# Altium PCB Steering_Converter_1R1 - Copy.PcbDoc
Units mm, origin at the board's own origin, x right, y up, seen from the top; angles counter-clockwise.
Board outline 51.05 x 38.73 mm, 2 copper layers (Top Layer, Bottom Layer); 26 components, 23 nets, 106 pads, 23 vias.
Unrouted connection lines stored in the file: 25.
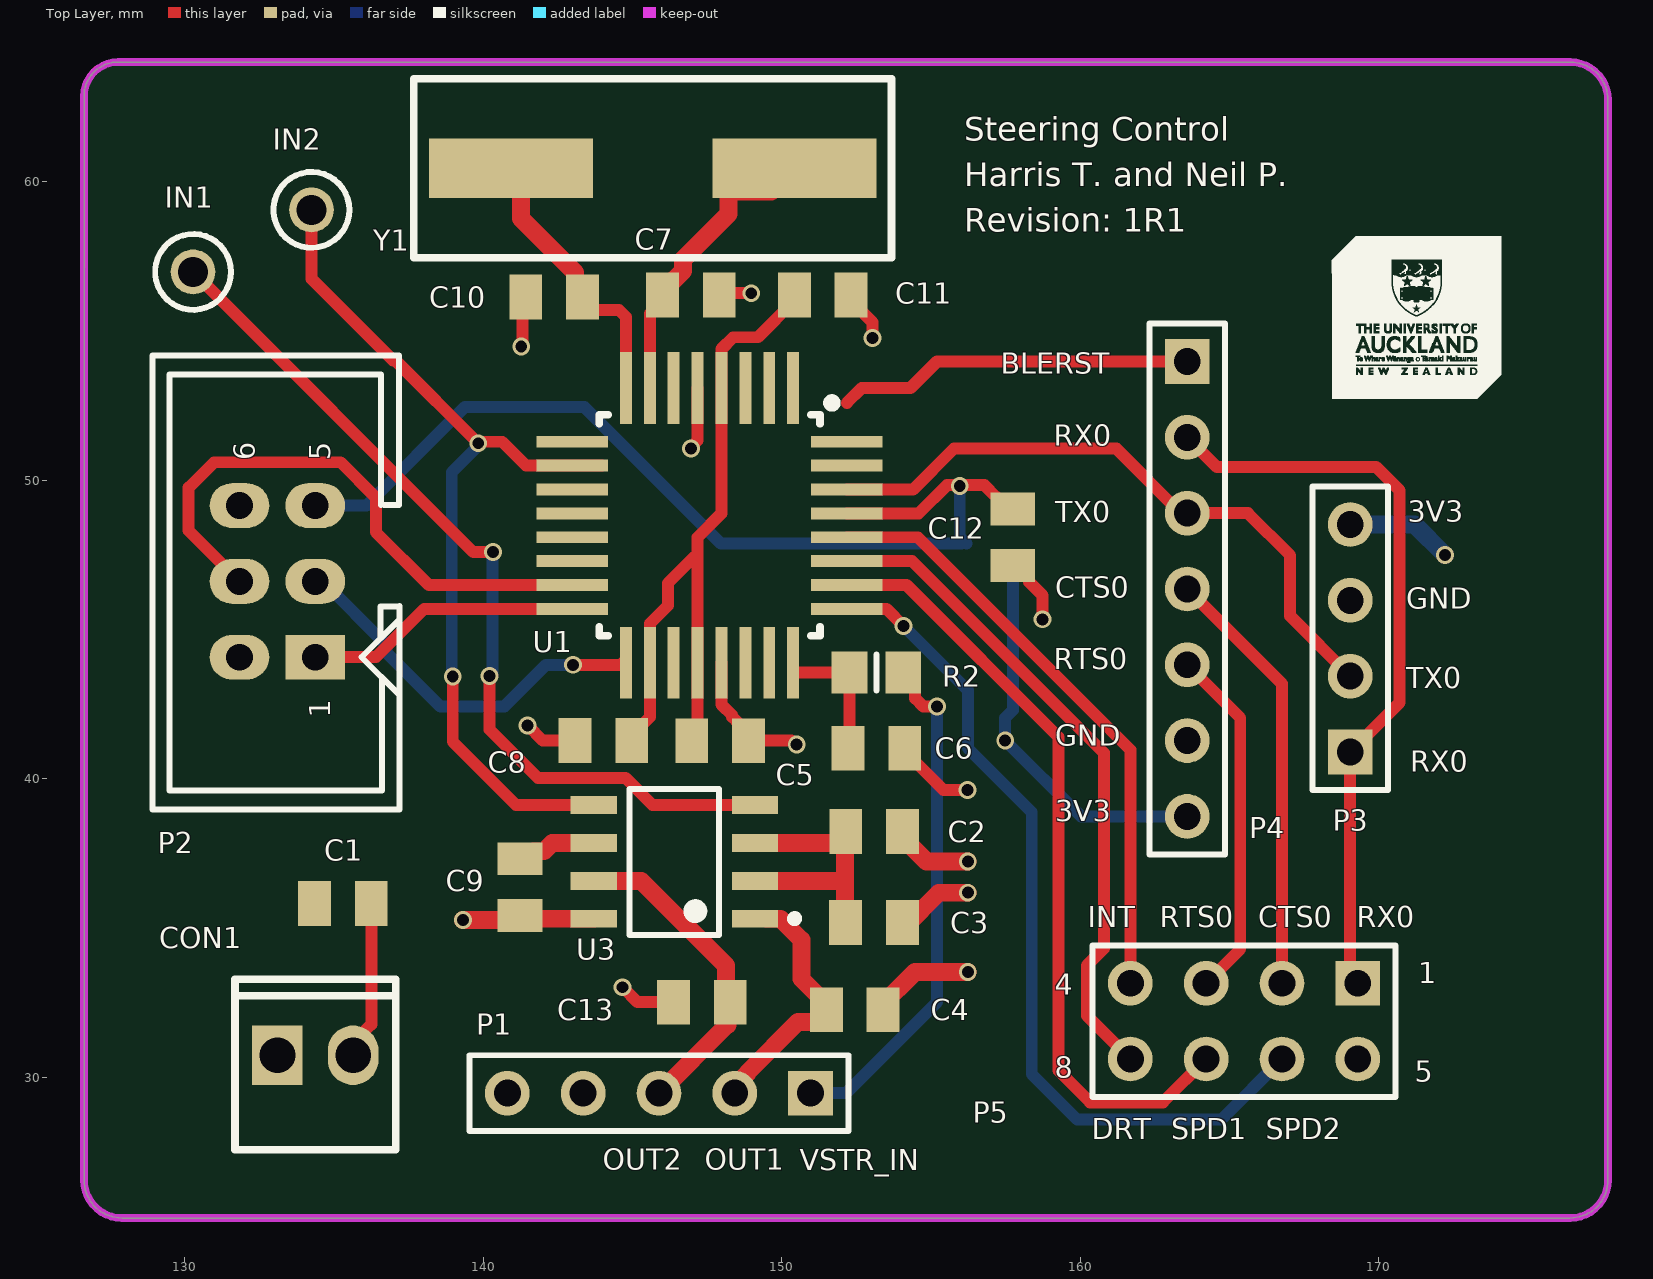
[diagram p0: Top Layer view]
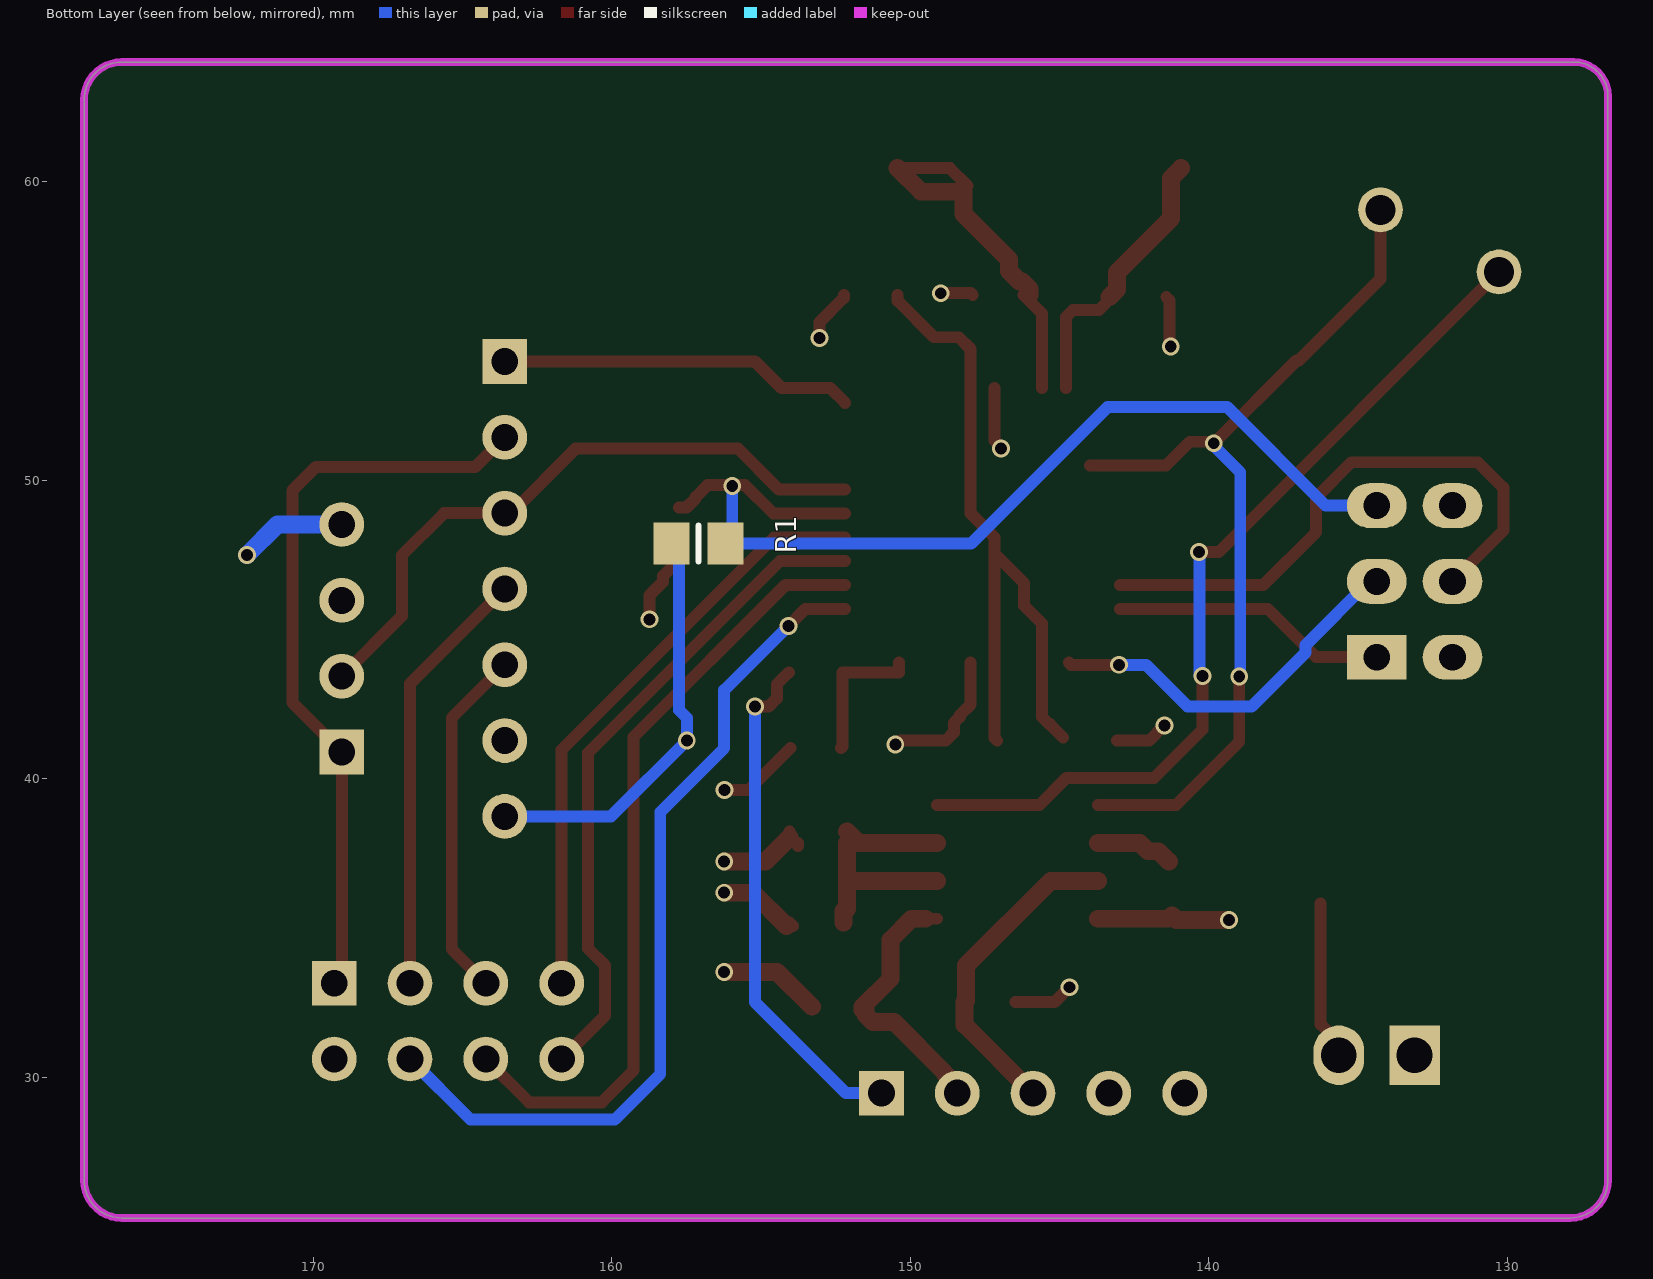
[diagram p1: Bottom Layer view, seen from below]

## Layer stack, top to bottom
Top Solder: solder mask 0.0102, Solder Resist, Dk 3.5
Top Layer: signal copper 0.0356
Dielectric 1: dielectric 0.32, FR-4, Dk 4.8
Bottom Layer: signal copper 0.0356
Bottom Solder: solder mask 0.0102, Solder Resist, Dk 3.5

## Board outline
126.619,26.551 126.619,62.865 cw(c127.762,62.865) 127.762,64.008 176.403,64.008 cw(c176.403,62.738) 177.673,62.738 177.673,26.551 cw(c176.403,26.551) 176.403,25.281 127.889,25.281 cw(c127.889,26.551)

## Design rules (kind name [scope] priority, off if disabled: settings)
Clearance Clearance_1 [InNamedPolygon('NONET_L01_P001') Or InNamedPolygon('GND_L02_P003')] p1: gap=0.4 ignorepadtopadclearanceinfootprint=FALSE
Clearance [All] p2: gap=0.5 ignorepadtopadclearanceinfootprint=TRUE except(0.3: Track-Track Track-SMDPad)
PolygonConnect [All] p1: connectstyle=Relief reliefconductorwidth=0.254 reliefentries=4 polygonreliefangle="90 Angle" airgapwidth=0.254
RoutingVias [All] p1: holewidth=0.711 width=1.27 viastyle="Through Hole" minholewidth=0.711 minwidth=1.27 maxholewidth=0.711 maxwidth=1.27
SolderMaskExpansion [All] p1: expansion=0.102 istentingtop=FALSE
Width [All] p1: maxlimit=0.6 minlimit=0.4 preferedwidth=0.4
30 further rules are at their usual default settings.

## Components (designator, comment, footprint, x,y, rotation, side; value= is the part's Value field where it differs from the comment)
C1 "100n" C0805 135.294,35.814 r180 top value=?
C2 "100n" C0805 153.088,38.227 r180 top value=?
C3 "100n" C0805 153.084,35.179 r180 top value=?
C4 "100n" C0805 152.439,32.258 r180 top value=?
C5 "100n" C0805 147.929,41.27 r180 top value=?
C6 "100n" C0805 153.162,41.021 r180 top value=?
C7 "18p" C0805 146.95,56.207 r180 top value=?
C8 "100n" C0805 144.018,41.275 r0 top value=?
C9 "1u" C0805 141.224,36.369 r90 top value=?
C10 "18p" C0805 142.367,56.134 r0 top value=?
C11 "100n" C0805 151.369,56.207 r180 top value=?
C12 "100n" C0805 157.734,48.087 r90 top value=?
C13 "100n" C0805 147.32,32.512 r0 top value=?
CON1 "Header 2X1" HDR2X1_2P54 133.096,30.734 r90 top
IN1 "5003" TP_TH 130.271,56.977 r0 top
IN2 "5003" TP_TH 134.239,59.055 r0 top
P1 "Header 5" HDR1X5 150.96,29.464 r180 top
P2 "HDR3X2" HDR2X3_2P54 134.366,44.069 r90 top
P3 "Header 4" HDR1X4 169.037,40.894 r90 top
P4 "BLE Header" HDR1X7 163.576,53.975 r270 top
P5 "Header 4X2A" HDR2X4_CEN 169.291,33.147 r180 top
R1 "Resistor 0805" R0805 157.088,47.879 r0 bottom value=?
R2 "Resistor 0805" R0805 153.162,43.561 r180 top value=?
U1 "ATMega328PB" TQFP32 147.574,48.487 r270 top
U3 "IC_Diodes_ZXBM5210-S-13_eec" Diodes_ZXBM5210-S-13_0 146.398,37.211 r90 top
Y1 "SMT-XTAL 8MHz" HC49-US 145.669,60.452 r180 top

## Footprints (in the part's own frame and the unit in brackets; to place one, negate y for a bottom-side part, rotate by r counter-clockwise, add the part's x,y. Pads: shape width x height; smd on the part's side, far side on the other; paste and mask are expansions set on the pad)
C0805 [mm]
  rect 1.1x1.5 smd: 1(-0.95,0) 2(0.95,0)
  body extent -1.1,-0.72 1.1,0.72, height 1.1
Diodes_ZXBM5210-S-13_0 [mm]
  rect 0.6x1.55 smd paste+0 mask+0: 1(-1.905,-2.7) 2(-0.635,-2.7) 3(0.635,-2.7) 4(1.905,-2.7) 5(1.905,2.7) 6(0.635,2.7) 7(-0.635,2.7) 8(-1.905,2.7)
  silkscreen extent -2.45,-4.15 2.45,1.5
HC49-US [mm] "20Mhz Crystal"
  rect 5.5x2 smd: 1(-4.75,0) 2(4.75,0)
  silkscreen extent -8,-3 8,3, body extent -4.79,-2.4 4.79,2.4, height 3.8
HDR1X4 [mm] "Connector; Header; 4 Position"
  rect 1.5x1.5 hole 0.9: 1(0,0)
  round 1.5 hole 0.9: 2(2.54,0) 3(5.08,0) 4(7.62,0)
  silkscreen extent -1.27,-1.27 8.89,1.27
HDR1X5 [mm] "Connector; Header; 5 Position"
  rect 1.5x1.5 hole 0.9: 1(0,0)
  round 1.5 hole 0.9: 2(2.54,0) 3(5.08,0) 4(7.62,0) 5(10.16,0)
  silkscreen extent -1.27,-1.27 11.43,1.27
HDR1X7 [mm] "Connector; Header; 7 Position"
  rect 1.5x1.5 hole 0.9: 1(0,0)
  round 1.5 hole 0.9: 2(2.54,0) 3(5.08,0) 4(7.62,0) 5(10.16,0) 6(12.7,0) 7(15.24,0)
  silkscreen extent -1.27,-1.27 16.51,1.27
HDR2X1_2P54 [mm] "Polarised Header 2 way"
  rect 2x1.7 hole 1.2: 1(0,0)
  oval 2x1.7 hole 1.2: 2(0,-2.54)
  silkscreen extent -3.16,-3.96 2.54,1.42, body extent -3.3,-3.64 3.17,1.44, height 9.99
HDR2X3_2P54 [mm] "IDC 3X2 Way 2.54 pitch"
  rect 1.5x2 hole 0.9: 1(0,0)
  oval 1.5x2 hole 0.9 paste+0: 2(0,2.54)
  oval 1.5x2 hole 0.9: 3(2.54,0) 4(2.54,2.54) 5(5.08,0) 6(5.08,2.54)
  silkscreen extent -5.1,-2.82 10.1,5.45, body extent -5.07,-3.17 10.17,6.28, height 9.1
HDR2X4_CEN [mm] "Connector; Header; 4x2 Position"
  rect 1.5x1.5 hole 0.9: 1(0,0)
  round 1.5 hole 0.9: 2(2.54,0) 3(5.08,0) 4(7.62,0) 5(0,2.54) 6(2.54,2.54) 7(5.08,2.54) 8(7.62,2.54)
  silkscreen extent -1.27,-1.27 8.89,3.81
R0805 [mm]
  rect 1.2x1.4 smd: 1(-0.9,0) 2(0.9,0)
  silkscreen extent 0,-0.6 0,0.6, body extent -1.07,-0.7 1.07,0.7, height 0.65
TP_TH [mm] "Test Point, Through Hole, Dia 2.54mm"
  round 1.5 hole 1: 1(0,0)
  silkscreen extent -1.27,-1.27 1.27,1.27, body extent -1.27,-1.27 1.27,1.27, height 4.57
TQFP32 [mm]
  rect 2.4x0.4 smd: 1(-4.6,2.8) 2(-4.6,2) 3(-4.6,1.2) 4(-4.6,0.4) 5(-4.6,-0.4) 6(-4.6,-1.2) 7(-4.6,-2) 8(-4.6,-2.8) 17(4.6,-2.8) 18(4.6,-2) 19(4.6,-1.2) 20(4.6,-0.4) 21(4.6,0.4) 22(4.6,1.2) 23(4.6,2) 24(4.6,2.8)
  rect 0.4x2.4 smd: 9(-2.8,-4.6) 10(-2,-4.6) 11(-1.2,-4.6) 12(-0.4,-4.6) 13(0.4,-4.6) 14(1.2,-4.6) 15(2,-4.6) 16(2.8,-4.6) 25(2.8,4.6) 26(2,4.6) 27(1.2,4.6) 28(0.4,4.6) 29(-0.4,4.6) 30(-1.2,4.6) 31(-2,4.6) 32(-2.8,4.6)
  silkscreen extent -4.24,-3.7 3.7,4.24, body extent -3.5,-3.5 3.5,3.5, height 1.3

## Part data
C1 C2 C3 C4 C6 C7 C8 C9 C10 C11 C12 C13: library part CCAP0805, "CCAP0805", MPN=?, Part Description=?, Type="Surface Mount"
C5: library part CCAP0805, "CCAP0805", MPN=?, Supplier Part Number 1=1276-1099-1-ND, Part Description=?, Supplier 1=Digi-Key, Type="Surface Mount"
CON1: library part HDR2X1
IN1 IN2: library part TestPoint, "Test Point, Orange, 1-Pin THD, RoHS", Forward Current="3 A", Forward Voltage="1.08 V", Max Operating Temperature="150 degC", Max Surge Current="80 A", Min Operating Temperature="-65 degC", Package Quantity=500, Peak Reverse Current="600 uA", ComponentLink1Description="Manufacturer URL", ComponentLink1URL=http://www.keyelco.com/, ComponentLink2Description=Datasheet, ComponentLink2URL=http://keyelco.com/userAssets/file/M65p56.pdf, DatasheetVersion=Jun-15, Diameter="5.3 mm", Height="0.25 inch", Length="9.5 mm", Mount="Through Hole", PackageDescription="1-Pin Through Hole Device, Dia 2.54 mm", PackageReference=5003, Packaging=Bulk, Pins=2, Radiation Hardening=No, REACH SVHC="No SVHC", RoHSCompliant=true, Weight="0.01 lb", Width="0.25 inch"
P1: "Header, 5-Pin", LatestRevisionDate=17-Jul-2002, LatestRevisionNote="Re-released for DXP Platform.", Publisher="Altium Limited"
P2: "Header, 3-Pin, Dual row"
P3: "Header, 4-Pin", LatestRevisionDate=17-Jul-2002, LatestRevisionNote="Re-released for DXP Platform.", Publisher="Altium Limited"
P4: library part "Header 7", "Header, 7-Pin", LatestRevisionDate=17-Jul-2002, LatestRevisionNote="Re-released for DXP Platform.", Publisher="Altium Limited"
P5: "Header, 4-Pin, Dual row", LatestRevisionDate=17-Jul-2002, LatestRevisionNote="Re-released for DXP Platform.", Publisher="Altium Limited"
R1 R2: library part RES0805, "RES0805", MPN=?, Part Description=?, Type="Surface Mount"
U1: "IC MCU 8BIT 32KB FLASH 32TQFP", Supplier Part Number 1=ATMEGA328PB-AU-ND, Supplier 1=Digi-Key, Supplier 2=Digi-Key, Supplier 3=Digi-Key, Supplier 4=Digi-Key
U3: "IC MOTOR DRIVER PWM 8SOIC", Digikey Part Number=ZXBM5210-S-13DICT-ND, Manufacturer=Diodes, Mouser Part Number=621-ZXBM5210-S-13, Package=SO-8, Part Number=ZXBM5210-S-13, Temperature="-40°C to +85°C", Temperature Range High=+85°C, Temperature Range Low=-40°C, Voltage=18V, ComponentLink1Description=Upverter, ComponentLink1URL=https://upverter.com/upn/revision/7a867377f73a3c32/, ComponentLink2Description=Datasheet, ComponentLink2URL=https://www.diodes.com/assets/Datasheets/ZXBM5210.pdf, Digikey Description="IC MOTOR DRIVER PWM 8SOIC", helpURL=https://upverter.com/upn/revision/7a867377f73a3c32/, Lead Free=yes, Price=0.759009212461, RoHS=TRUE, Supplier 1=Digi-Key, Supplier 2=Mouser, Supplier Part Number 1=ZXBM5210-S-13DICT-ND, Supplier Part Number 2=621-ZXBM5210-S-13
Y1: library part TXC9C-16_XTAL_SMT, "9C-16.000MAAJ-T crystal 16.0000MHZ 18PF SMD", Frequency Stability=±30ppm, Load Capacitance=18pF, Manufacturer="TXC CORPORATION", Manufacturer Part Number=9C-16.000MAAJ-T, Operating Mode=Fundamental, Operating Temperature="-20°C ~ 70°C", Package / Case=HC-49/US, Ratings=-, Supplier Part Number 1=887-1059-1-ND, Category="Crystals, Oscillators, Resonators", ComponentLink1Description=http://www.txccorp.com/download/products/quartz_crystals/2015TXC_9C_32.pdf, ComponentLink1URL=http://www.txccorp.com/download/products/quartz_crystals/2015TXC_9C_32.pdf, Frequency Tolerance=±30ppm, Height - Seated (Max)="0.161\" (4.10mm)", Mounting Type="Surface Mount", Packaging="Cut Tape (CT)", Part Status=Active, Pricing 1="1=0.75, 10=0.628, 50=0.5656, 100=0.5026, 500=0.47744 (NZD)", RoHS="RoHS Compliant", Size / Dimension="0.449\" L x 0.189\" W (11.40mm x 4.80mm)", Stock 1=11514, Supplier 1=Digi-Key, Type="MHz Crystal"

## Via types
v1: diameter 0.6, hole 0.4, Top Layer to Bottom Layer, 23 vias

## Nets (pads, with @x,y where several pads share a name; then routed paths per layer and width w, separated by ;. In a path a pad name is that pad's centre, name@x,y a point inside that pad or via, vN(x,y) a via of type N, cw(c..) or ccw(c..) an arc to the next point about the centre after c; other vN are vias at no path point)
3V3: C1.2 C2.2 C3.2 C5.2 C8.2 C9.2 C11.2 CON1.1 P1.5 P2.2 P3.4 P4.7 R1.2 U1.4 U1.18 U1.20 U3.2 U3.3 U3.6 | length 52.3
  Top Layer w0.4: C8.2@144.868,41.375 145.318,41.825 145.34,41.825 145.574,42.059 U1.18@145.574,43.787 ; U1.18 145.574,45.194 146.179,45.799 146.179,46.547 147.079,47.447 ; C5.2@147.079,41.27 147.174,41.365 U1.20 147.174,47.447 147.174,48.087 147.974,48.887 147.974,54.394 148.367,54.787 149.199,54.787 150.419,56.007 C11.2 ; P4.7 P4.7@163.786,38.525
  Top Layer w0.6: C9.2@141.324,37.219 141.674,37.569 142.027,37.569 142.304,37.846 U3.6 ; U3.2 152.111,36.576 ; U3.3 151.73,37.846 C2.2@152.111,38.227 ; C3.2@152.111,35.629 152.111,36.576 ; C2.2@152.111,37.846 152.111,36.576 ; C3.2@152.165,35.629 152.234,35.56 C3.2@152.234,35.179
  Bottom Layer w0.4: R1.2@157.734,47.23 157.734,42.291 157.48,42.037 v1(157.48,41.275) 160.02,38.735 P4.7
  Bottom Layer w0.6: P3.4 171.192,48.514 v1(172.219,47.487)
BLE_RST: P4.1 U1.2 | length 12.5
  Top Layer w0.4: 152.174,52.587 152.674,53.087 153.035,53.087 154.306,53.087 155.194,53.975 P4.1
  Bottom Layer w0.6: P4.1 P4.1@163.957,54.356
CTS_0: P4.4 P5.2 | length 14.5
  Top Layer w0.4: P4.4 166.751,43.18 P5.2
DRT: P5.8 U1.27 | length 22.4
  Top Layer w0.4: U1.27 154.363,47.287 160.782,40.868 160.782,34.309 160.221,33.748 160.221,32.057 P5.8
GND: C1.1 C2.1 C3.1 C4.1 C5.1 C6.1 C7.1 C8.1 C9.1 C10.1 C11.1 C12.1 C13.1 CON1.2 P1.4 P2.6 P3.3 P4.6 U1.5 U1.21 U3.8 | length 39.2
  Top Layer w0.4: CON1.2 135.636,31.16 136.244,31.768 C1.1 ; v1(141.267,54.483) 141.305,54.521 141.305,56.022 C10.1 ; v1(141.478,41.783) 141.986,41.275 C8.1 ; v1(144.653,33.012) 144.661,33.012 145.161,32.512 C13.1 C13.1@146.47,32.512 ; v1@146.95,51.108 147.174,51.332 U1.5 ; C7.1 147.968,56.275 148.957,56.275 v1(148.971,56.261) ; U1.21 147.974,42.482 148.329,42.127 148.329,42.07 148.529,41.87 148.529,41.55 148.804,41.275 150.314,41.275 150.441,41.148 v1(150.495,41.148) ; C11.1@152.219,56.207 152.219,56.107 153.035,55.291 v1(153.035,54.762) ; C2.1@153.758,37.746 C2.1@153.758,37.846 ; C3.1@153.924,35.069 C3.1 C3.1@154.144,35.069 ; C6.1@154.012,41.021 155.409,39.624 v1(156.21,39.624) ; C2.1@154.038,38.027 C2.1 ; C12.1 157.934,47.137 158.284,46.787 158.284,46.587 158.734,46.137 v1(158.734,45.339)
  Top Layer w0.6: v1(139.319,35.269) 141.074,35.269 C9.1 141.337,35.306 U3.8 ; C4.1@153.289,32.358 154.459,33.528 v1(156.226,33.528) ; C2.1@154.038,38.027 154.838,37.227 v1(156.226,37.227) ; C3.1@154.144,35.069 155.254,36.179 v1(156.226,36.179)
  other v1: 146.95,51.054
IN1: IN1.1 U1.13 U3.4 | length 29.8
  Top Layer w0.4: IN1.1 139.66,47.588 v1(140.326,47.588) ; v1(140.208,43.434) 140.208,41.639 141.822,40.025 144.76,40.025 145.669,39.116 U3.4
  Bottom Layer w0.4: v1@140.3,43.444 140.3,47.562 v1(140.326,47.588)
IN2: IN2.1 U1.10 U3.5 | length 30.7
  Top Layer w0.4: IN2.1 134.239,56.742 136.973,54.008 137.055,54.008 v1(139.827,51.236) 139.881,51.236 139.932,51.287 140.63,51.287 141.43,50.487 U1.10@143.974,50.487 ; v1(138.971,43.418) 138.971,41.242 141.097,39.116 U3.5
  Bottom Layer w0.4: v1(138.971,43.418) 138.938,43.451 138.938,50.265 139.827,51.154 v1(139.827,51.236)
MISO: P2.1 U1.16 | length 9.3
  Top Layer w0.4: P2.1 136.398,44.069 138.016,45.687 U1.16
MOSI: P2.4 U1.15 | length 19.4
  Top Layer w0.4: P2.4 130.126,48.309 130.126,49.75 130.975,50.599 135.217,50.599 136.398,49.418 136.398,48.26 138.176,46.482 141.852,46.482 141.857,46.487 U1.15
OUT1: C4.2 P1.2 U3.1 | length 9.1
  Top Layer w0.4: U3.1 U3.1@149.479,35.306
  Top Layer w0.6: P1.2 148.42,29.708 148.853,30.141 148.853,30.164 150.531,31.843 151.239,31.843 151.489,32.093 C4.2 ; U3.1@149.479,35.306 149.947,35.306 150.65,34.603 150.65,33.297 151.589,32.358 C4.2@151.589,32.258
OUT2: C13.2 P1.3 U3.7 | length 10.8
  Top Layer w0.6: U3.7 145.288,36.576 148.125,33.739 148.125,32.557 148.17,32.512 148.17,31.754 P1.3
RST: C12.2 P2.5 R1.1 U1.29 | length 33.2
  Top Layer w0.4: U1.29 154.584,48.887 155.534,49.837 156.78,49.837 157.184,49.433 157.184,49.387 157.488,49.083 C12.2@157.734,49.083
  Bottom Layer w0.4: P2.5 136.079,49.149 139.381,52.451 143.383,52.451 147.955,47.879 R1.1@156.013,47.879 ; v1(155.956,49.809) 155.956,48.111 R1.1
RTS_0: P4.5 P5.3 | length 11.9
  Top Layer w0.4: P4.5 165.354,42.037 165.354,34.29 P5.3
RX_0: P3.1 P4.2 P5.1 | length 25.1
  Top Layer w0.4: P4.2 164.57,50.441 169.904,50.441 170.688,49.657 170.688,42.545 P3.1 169.037,33.401 P5.1
SCK: P2.3 U1.17 | length 12.7
  Top Layer w0.4: v1(143.002,43.815) 144.602,43.815 U1.17@144.674,43.887
  Bottom Layer w0.4: P2.3 134.616,46.609 136.754,44.471 136.754,44.221 138.557,42.418 140.699,42.418 142.096,43.815 v1@142.875,43.815
SPD_1: P5.6 U1.25 | length 28.8
  Top Layer w0.4: U1.25 153.502,45.687 v1(154.078,45.112)
  Bottom Layer w0.4: v1(154.078,45.112) 156.226,42.963 156.226,41.022 158.369,38.879 158.369,30.099 159.893,28.575 164.719,28.575 P5.6
SPD_2: P5.7 U1.26 | length 26.4
  Top Layer w0.4: U1.26 154.173,46.487 159.258,41.402 159.258,30.226 160.327,29.157 162.761,29.157 P5.7
ST_INT: P5.4 U1.28 | length 20.3
  Top Layer w0.4: U1.28 154.553,48.087 161.671,40.969 P5.4
TX_0: P3.2 P4.3 U1.30 | length 21.8
  Top Layer w0.4: U1.30 154.394,49.687 155.761,51.054 161.207,51.054 163.366,48.895 165.608,48.895 167.022,47.481 167.022,45.449 P3.2
VSTR_IN: P1.1 R2.1 | length 17.3
  Top Layer w0.4: R2.1 154.462,43.161 154.462,42.691 154.735,42.418 v1(155.194,42.418)
  Bottom Layer w0.4: P1.1 152.146,29.464 155.194,32.512 v1(155.194,42.418)
VSTR_OUT: C6.2 R2.2 U1.24 | length 4.8
  Top Layer w0.4: U1.24 150.374,43.561 R2.2 152.262,41.071 C6.2@152.312,41.021
X1: C7.2 U1.7 Y1.1 | length 12.9
  Top Layer w0.4: U1.7 145.574,55.581 C7.2@146.2,56.207 ; Y1.1@148.072,59.855 148.669,60.452 Y1.1
  Top Layer w0.6: C7.2 146,56.407 146.25,56.657 146.336,56.657 146.687,57.008 146.687,57.394 148.206,58.913 148.206,59.657 149.643,59.676 Y1.1
X2: C10.2 U1.8 Y1.2 | length 9.2
  Top Layer w0.4: C10.2@143.444,55.93 143.667,55.707 144.54,55.707 144.774,55.473 U1.8
  Top Layer w0.6: Y1.2 141.256,60.115 141.256,58.769 143.067,56.958 143.067,56.384 C10.2
pads on no net: P5.5 U1.1 U1.3 U1.6 U1.9 U1.11 U1.12 U1.14 U1.19 U1.22 U1.23 U1.31 U1.32

## Polygon pours and split planes (outlines as drawn)
3V3 on Top Layer "NONET_L01_P001" (solid, remove dead copper, shelved, pour order 1): 126.678,63.228 cw(c127.458,63.228) 127.458,64.008 176.403,64.008 cw(c176.403,62.738) 177.673,62.738 177.673,26.551 cw(c176.403,26.551) 176.403,25.281 127.889,25.281 cw(c127.889,26.551) 126.619,26.551
GND on Bottom Layer "NONET_L02_P000" (solid, remove dead copper, shelved, pour order 0): 126.619,62.865 cw(c127.762,62.865) 127.762,64.008 176.403,64.008 cw(c176.403,62.738) 177.673,62.738 177.673,26.551 cw(c176.403,26.551) 176.403,25.281 127.889,25.281 cw(c127.889,26.551) 126.619,26.551

## Keep-outs
Keep-Out Layer:
  lines w0.254: 126.619,26.551 ccw(c127.889,26.551) 127.889,25.281 129.386,25.281 175.504,25.281 175.522,25.281 176.403,25.281 ccw(c176.403,26.551) 177.673,26.551 177.673,62.738 ccw(c176.403,62.738) 176.403,64.008 175.006,64.008 129.159,64.008 127.762,64.008 ccw(c127.762,62.865) 126.619,62.865 126.619,60.833 126.619,28.321 126.619,26.551

## Silkscreen, mask and mechanical layers (free items; w line width, h text height)
Top Overlay:
  drawing of 24 lines, arcs and shapes, not listed
  text "Steering Control" at 156.106,61.377 h0.8
  text "Harris T. and Neil P." at 156.106,59.84 h0.8
  text "Revision: 1R1" at 156.106,58.316 h0.8
  text "BLERST" at 157.326,53.567 h0.7
  text "RX0" at 159.104,51.154 h0.7
  text "3V3" at 170.965,48.614 h0.7
  text "TX0" at 159.16,48.598 h0.7
  text "CTS0" at 159.16,46.058 h0.7
  text "GND" at 170.915,45.693 h0.7
  text "RTS0" at 159.104,43.661 h0.7
  text "TX0" at 170.915,43.026 h0.7
  text "GND" at 159.16,41.105 h0.7
  text "RX0" at 171.042,40.232 h0.7
  text "3V3" at 159.16,38.565 h0.7
  text "INT" at 160.247,35.025 h0.7
  text "RTS0" at 162.66,35.025 h0.7
  text "CTS0" at 165.962,35.025 h0.7
  text "RX0" at 169.264,35.025 h0.7
  text "DRT" at 160.374,27.913 h0.7
  text "SPD1" at 163.041,27.913 h0.7
  text "SPD2" at 166.216,27.913 h0.7
  text "OUT2" at 143.991,26.897 h0.7
  text "OUT1" at 147.42,26.897 h0.7
  text "VSTR_IN" at 150.595,26.887 h0.7

## Text inside footprints (layer, text, board x,y; h text height)
P2: Top Overlay "1" at 134.874,42.037 h0.7 r90; Top Overlay "5" at 134.874,50.673 h0.7 r90; Top Overlay "6" at 132.334,50.673 h0.7 r90
P5: Top Overlay "8" at 159.131,29.972 h0.7; Top Overlay "4" at 159.131,32.766 h0.7; Top Overlay "1" at 171.323,33.147 h0.7; Top Overlay "5" at 171.196,29.845 h0.7